# Allegro board hfplink_v1.brd
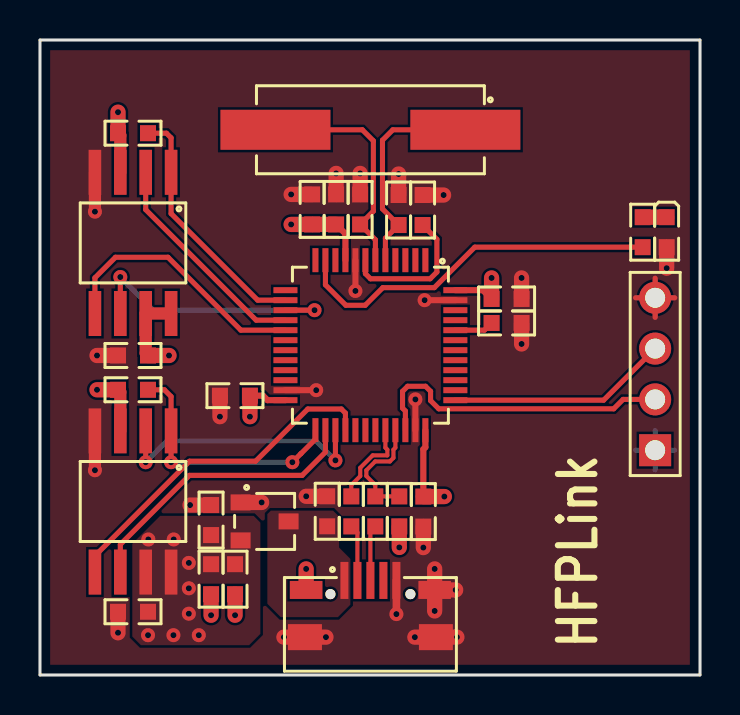
[diagram p0: board, top side]
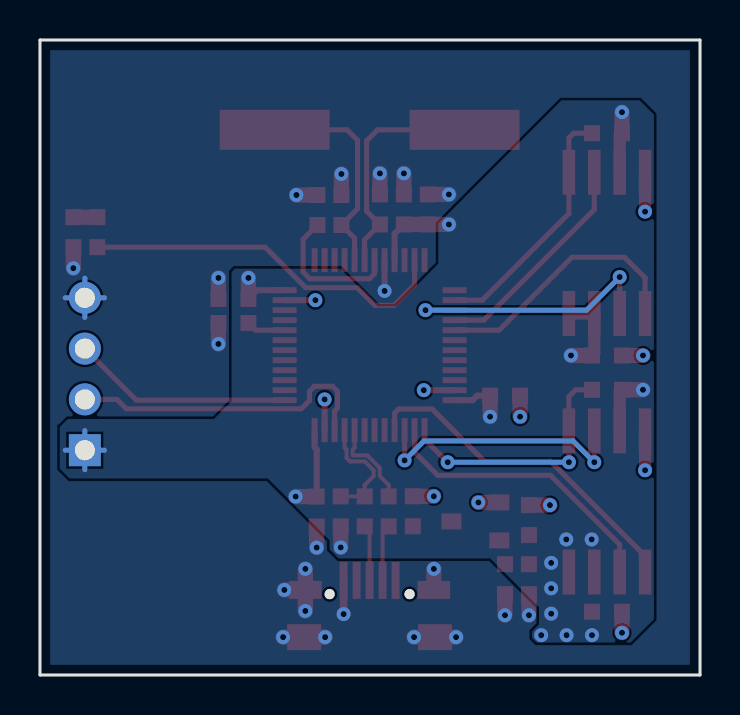
[diagram p1: board, bottom side, seen from below]

Outline 33.02 x 31.75 mm; copper layers: TOP, BOTTOM. Coordinates in mm from the lower left corner of the outline.
Outline path: 0,31.75 0,0 33.02,0 33.02,31.75 0,31.75

## Design rules (mm)
net group USB_DPB: nets D+ D-
net group USB_DPF: nets N01748 N01752

## Placement (name value [footprint] x y rotation side)
C1  100nF  [C0603]  23.34 18.8 180 top
C2  100nF  [C0603]  19.18 8.17 90 top
C3  18pF  [C0603]  17.94 23.25 270 top
C4  18pF  [C0603]  16.01 23.28 270 top
C5  100nF  [C0603]  19.14 23.25 270 top
C6  10uF  [C0603]  14.37 8.19 90 top
C7  10uF  [C0603]  8.56 7.75 90 top
C8  10uF  [C0603]  8.56 4.79 270 top
C9  100nF  [C0603]  9.76 4.79 270 top
C10  4.7uF  [C0603]  14.82 23.28 270 top
C11  100nF  [C0603]  13.62 23.28 90 top
C12  100nF  [C0603]  9.75 13.97 0 top
C13  100nF  [C0603]  4.65 15.98 180 top
C14  100nF  [C0603]  4.65 3.16 180 top
J1  USB_MICRO  [USB-MICRO-5-SM]  16.53 3.07 0 top
J2  HEADER-4X1  [HDR4X1-2R54-TM-VM]  30.78 11.24 90 top
LED1  GREEN  [LED0603]  31.35 22.14 270 top
R1  20R  [R0603]  15.58 8.18 90 top
R2  10K  [R0603]  23.34 17.6 180 top
R3  20R  [R0603]  16.78 8.18 90 top
R4  1.5K  [R0603]  17.98 8.18 270 top
R5  2K  [R0603]  30.15 22.14 270 top
R6  10K  [R0603]  4.65 27.09 0 top
R7  10K  [R0603]  4.65 14.26 0 top
U1  STM32F103C8T6  [LQFP-48-1R20X0R30]  16.53 16.49 180 top
U2  XC6206P332MR  [SOT-23-3-1R00X0R80]  11.24 7.68 0 top
U3  W25Q128JVSIQ  [SOIC-8-2R25X0R63]  4.65 21.6 180 top
U4  W25Q128JVSIQ  [SOIC-8-2R25X0R63]  4.65 8.68 180 top
X1  8MHz  [HC-49S]  16.53 27.26 180 top

## Library data of the parts
C1-C14 = CAPACITOR-NON-POL
J1 = USB_MICRO
J2 = HEADER-4X1
LED1 = LED
R1-R7 = RESISTOR
U1 = STM32F103C8T6
U2 = XC6206P332MR
U3 U4 = W25Q128JVSIQ
X1 = XTAL-CRY-2

## Footprints (pads in the part's own frame, mm; a bottom-side part is the same pattern mirrored in y, then rotated)
C0603
  rect 0.8x0.8 smd: 1(-0.75,0) 2(0.75,0)
HC-49S
  rect 5.5x2 smd: 1(-4.75,0) 2(4.75,0)
HDR4X1-2R54-TM-VM
  rect 1.6x1.6 hole 1: 1(0,0)
  round 1.6 hole 1: 2(2.54,0) 3(5.08,0) 4(7.62,0)
LED0603
  rect 0.8x0.8 smd: 1(-0.75,0) 2(0.75,0)
LQFP-48-1R20X0R30
  rect 0.3x1.2 smd: 1(-2.75,-4.25) 2(-2.25,-4.25) 3(-1.75,-4.25) 4(-1.25,-4.25) 5(-0.75,-4.25) 6(-0.25,-4.25) 7(0.25,-4.25) 8(0.75,-4.25) 9(1.25,-4.25) 10(1.75,-4.25) 11(2.25,-4.25) 12(2.75,-4.25) 25(2.75,4.25) 26(2.25,4.25) 27(1.75,4.25) 28(1.25,4.25) 29(0.75,4.25) 30(0.25,4.25) 31(-0.25,4.25) 32(-0.75,4.25) 33(-1.25,4.25) 34(-1.75,4.25) 35(-2.25,4.25) 36(-2.75,4.25)
  rect 1.2x0.3 smd: 13(4.25,-2.75) 14(4.25,-2.25) 15(4.25,-1.75) 16(4.25,-1.25) 17(4.25,-0.75) 18(4.25,-0.25) 19(4.25,0.25) 20(4.25,0.75) 21(4.25,1.25) 22(4.25,1.75) 23(4.25,2.25) 24(4.25,2.75) 37(-4.25,2.75) 38(-4.25,2.25) 39(-4.25,1.75) 40(-4.25,1.25) 41(-4.25,0.75) 42(-4.25,0.25) 43(-4.25,-0.25) 44(-4.25,-0.75) 45(-4.25,-1.25) 46(-4.25,-1.75) 47(-4.25,-2.25) 48(-4.25,-2.75)
R0603
  rect 0.8x0.8 smd: 1(-0.75,0) 2(0.75,0)
SOIC-8-2R25X0R63
  rect 0.63x2.25 smd: 1(-1.905,-3.53) 2(-0.635,-3.53) 3(0.635,-3.53) 4(1.905,-3.53) 5(1.905,3.53) 6(0.635,3.53) 7(-0.635,3.53) 8(-1.905,3.53)
SOT-23-3-1R00X0R80
  rect 1x0.8 smd: 1(-1.2,0.95) 2(-1.2,-0.95) 3(1.2,0)
USB-MICRO-5-SM
  rect 0.4x1.85 smd: 1(-1.3,1.655) 2(-0.65,1.655) 3(0,1.655) 4(0.65,1.655) 5(1.3,1.655)
  rect 1.63x0.9 smd: 6(-3.215,1.18) 7(3.215,1.18)
  rect 1.7x1.3 smd: 8(-3.275,-1.18) 9(3.275,-1.18)
  round 0.51 hole 0.5: 10(-2,0.97) 11(2,0.97)

## Nets
GND: C1.1 C2.1 C3.1 C4.1 C5.1 C6.2 C7.2 C8.2 C9.2 C10.1 C11.2 C12.1 C13.2 C14.2 J1.5(GND) J1.6(LP1) J1.7(LP2) J1.8(LP3) J1.9(LP4) J2.4 LED1.2 R2.1 U1.8(VSSA) U1.23(VSS_1) U1.35(VSS_2) U1.47(VSS_3) U2.1(VSS) U3.4(GND) U4.4(GND)
VCC_3V3: C1.2 C2.2 C7.1 C8.1 C9.1 C10.2 C11.1 C12.2 C13.1 C14.1 J2.1 R4.2 R6.1 R7.1 U1.9(VDDA) U1.24(VDD_1) U1.36(VDD_2) U1.48(VDD_3) U2.2(VOUT) U3.3(W\P\) U3.7(H\O\L\D\) U3.8(VCC) U4.3(W\P\) U4.7(H\O\L\D\) U4.8(VCC)
VCC_5V: C6.1 J1.1(VCC) U2.3(VIN)
D+: R3.2 R4.1 U1.33(PA12)
D-: R1.2 U1.32(PA11)
SPI1_CLK: U1.15(PA5) U3.6(CLK)
SPI1_CS: R6.2 U1.14(PA4) U3.1(C\S\)
SPI1_MISO: U1.16(PA6) U3.2(DO)
SPI1_MOSI: U1.17(PA7) U3.5(DI)
SPI2_CLK: U1.26(PB13) U4.6(CLK)
SPI2_CS: R7.2 U1.25(PB12) U4.1(C\S\)
SPI2_MISO: U1.27(PB14) U4.2(DO)
SPI2_MOSI: U1.28(PB15) U4.5(DI)
SWCLK: J2.3 U1.37(PA14)
SWDIO: J2.2 U1.34(PA13)
N01748: J1.2(D-) R1.1
N01752: J1.3(D+) R3.1
N02190: C3.2 U1.5(PD0-OSC_IN) X1.1(OUT1)
N02267: C4.2 U1.6(PD1-OSC_OUT) X1.2(OUT2)
N03348: C5.2 U1.7(NRST)
N04630: R5.2 U1.11(PA1)
N04691: LED1.1 R5.1
N08223: R2.2 U1.44(BOOT0)

Pads without a net: J1 4 10 11; U1 1 2 3 4 10 12 13 18 19 20 21 22 29 30 31 38 39 40 41 42 43 45 46

## Via types
v1: diameter 0.7, hole 0.305, TOP to BOTTOM, 54 vias

## Routing (per net, layer and track width the routed paths; a pad name or vN(x,y) marks a point on that pad's centre or on a via; arc(x,y) is an arc through that point)
GND: length 45.9
  TOP w0.254: 30.78,17.88 J2.4 ; J2.4 31.75,18.86 ; J2.4 29.8,18.86 ; J2.4 30.78,19.84
  TOP w0.305: U1.47 v1(19.24,18.74) ; U1.23 v1(13.82,14.24) ; U1.35 v1(18.78,13.78) ; U1.8 v1(15.78,19.2)
  TOP w0.381: J1.5 v1(17.83,3.05)
  TOP w0.61: U3.4 v1(2.75,23.17) ; U4.4 v1(2.75,10.24)
  TOP w0.762: C13.2 v1(2.85,15.98) ; C4.1 v1(16.01,25.08) ; C10.1 v1(14.82,25.08) ; C3.1 v1(17.94,25.05) ; v1(12.2,1.89) J1.8 v1(14.31,1.89) ; v1(18.75,1.89) J1.9 v1(20.86,1.89) ; C12.1 v1(9,12.92) ; C1.1 v1(24.09,19.85) ; J1.7 v1(20.8,4.25) ; J1.7 v1(19.75,5.3) ; J1.7 v1(19.75,3.2) ; C7.2 v1(7.51,8.5) ; LED1.2 v1(31.35,20.34) ; C8.2 v1(8.56,2.99) ; C2.1 v1(19.18,6.37) ; R2.1 v1(24.09,16.55) ; C5.1 v1(20.19,24) ; C9.2 v1(9.76,2.99) ; J1.6 v1(13.32,5.3) ; C11.2 v1(12.56,24.03) ; U2.1 v1(11.09,8.63) ; C6.2 v1(13.32,8.94) ; C14.2 v1(3.9,2.11)
  BOTTOM w0.254: J2.4 30.78,19.84 ; J2.4 31.75,18.86 ; J2.4 29.8,18.86 ; J2.4 30.78,17.88
VCC_3V3: length 30.2
  TOP w0.305: U1.24 11.38,13.74 11.16,13.97 C12.2 ; C2.2 19.18,11.28 19.28,11.39 U1.36 ; C1.2 22.15,19.24 U1.48 ; C10.2 15.28,22.06 U1.9
  TOP w0.61: U3.3 4.02,26.98 R6.1 ; U3.8 U3.7 5.29,16.09 C13.1 ; R7.1 4.02,14.15 U4.3
  TOP w0.762: R6.1 v1(3.9,28.14) ; C10.2 C11.1 v1(12.56,22.53) ; C2.2 v1(20.23,8.92) ; C1.2 v1(22.59,19.85) ; R7.1 v1(2.85,14.26) ; R4.2 v1(17.98,6.38) ; C12.2 v1(10.5,12.92) ; C13.1 v1(6.46,15.98)
  BOTTOM w0.254: 30.78,10.26 J2.1 ; J2.1 29.8,11.24 ; J2.1 30.78,12.22 ; J2.1 31.75,11.24
  vias: v1(5.42,6.78) v1(5.41,1.99) v1(6.69,6.78) v1(6.68,1.99) v1(7.45,5.61) v1(7.45,4.34) v1(7.45,3.07) v1(7.95,1.99)
D+: length 5.7
  TOP w0.203: R4.1 R3.2 16.78,9.5 16.33,9.95 16.33,10.23 16.77,10.68 17.5,10.68 17.68,10.86 17.68,11.27 17.78,11.37 U1.33
D-: length 4.5
  TOP w0.203: R1.2 15.58,9.5 16.02,9.95 16.02,10.36 16.64,10.98 17.38,10.98 17.38,11.27 17.28,11.37 U1.32
SPI1_CLK: length 13.7
  TOP w0.254: U1.15 v1(13.74,18.24) ; U3.6 v1(4.02,19.9)
  BOTTOM w0.254: v1(4.02,19.9) 5.68,18.24 v1(13.74,18.24)
SPI1_CS: length 12.6
  TOP w0.254: U1.14 10.89,18.74 6.56,23.07 U3.1 6.56,26.86 6.33,27.09 R6.2
SPI1_MISO: length 11.1
  TOP w0.254: U1.16 10.82,17.74 5.29,23.27 U3.2
SPI1_MOSI: length 13.3
  TOP w0.254: U1.17 10.05,17.24 6.4,20.89 3.78,20.89 2.75,19.86 U3.5
SPI2_CLK: length 14.7
  TOP w0.254: U1.26 14.28,11.14 13.12,9.98 7.48,9.98 4.02,6.53 U4.6
SPI2_CS: length 12.7
  TOP w0.254: v1(12.63,10.64) 13.05,11.07 13.06,11.07 13.78,11.79 U1.25 ; R7.2 6.22,14.26 6.56,13.92 U4.1 v1(6.56,10.64)
  BOTTOM w0.254: v1(6.56,10.64) v1(12.63,10.64)
SPI2_MISO: length 13.4
  TOP w0.254: U4.2 v1(5.29,10.64) ; U1.27 v1(14.78,10.73)
  BOTTOM w0.254: v1(5.29,10.64) 6.35,11.7 13.81,11.7 v1(14.78,10.73)
SPI2_MOSI: length 17.3
  TOP w0.254: U1.28 15.28,13.1 15.08,13.3 13.4,13.3 10.79,10.69 7.48,10.69 2.75,5.96 U4.5
SWCLK: length 11.1
  TOP w0.254: U1.37 28.2,13.74 J2.3
SWDIO: length 15.7
  TOP w0.254: U1.34 18.28,13.2 18.14,13.34 18.14,14.18 18.39,14.44 19.29,14.44 19.54,14.18 19.54,13.72 19.95,13.31 28.7,13.31 29.17,13.78 J2.2
N01748: length 2.8
  TOP w0.203: R1.1 15.88,7.13 J1.2
N01752: length 2.8
  TOP w0.203: R3.1 16.53,7.19 J1.3
N02190: length 11
  TOP w0.254: U1.5 17.28,21.84 C3.2 17.13,23.31 17.13,26.74 17.65,27.26 X1.1
N02267: length 11.7
  TOP w0.254: U1.6 16.78,21.76 C4.2 16.68,23.19 16.68,26.71 16.13,27.26 X1.2
N03348: length 7.1
  TOP w0.254: C5.2 19.86,21.78 19.86,20.15 19.52,19.81 16.53,19.81 16.28,20.07 U1.7
N04630: length 18.7
  TOP w0.254: R5.2 21.75,21.39 19.73,19.37 17.15,19.37 16.27,18.49 15.3,18.49 14.28,19.51 U1.11
N04691: length 1.2
  TOP w0.762: LED1.1 R5.1
N08223: length 2
  TOP w0.254: R2.2 22.23,17.24 U1.44

## Copper pours and planes (outline as drawn; the poured copper is in the pictures)
GND on TOP: 0.51,0.51 0.51,31.24 32.51,31.24 32.51,0.51 ; 3 cut-outs
GND on BOTTOM: 0.51,0.51 0.51,31.24 32.51,31.24 32.51,0.51
VCC_3V3 on TOP: 6.01,7.96 10.69,7.96 11.03,7.62 11.03,2.05 10.46,1.49 5.05,1.49 4.62,1.92 4.62,6.56
VCC_3V3 on BOTTOM: 8.41,2.18 8.06,2.53 8.06,3.39 10.49,5.83 18.08,5.83 18.53,6.28 18.53,6.74 21.62,9.83 31.54,9.83 32.03,10.32 32.03,12.4 32.03,12.4 31.63,12.8 24.32,12.8 23.44,13.68 23.44,15.61 23.44,20.16 23.28,20.32 18,20.32 16.11,18.43 15.22,18.43 13.91,19.74 13.91,19.74 13.09,20.57 13.09,22.57 11.53,24.14 6.93,28.73 3.02,28.73 2.31,28.02 2.31,2.79 3.47,1.62 8.18,1.62 8.41,1.85
VCC_5V on TOP: 11.55,8.22 14.66,8.22 14.96,7.92 14.96,6.37 15.53,5.8 15.53,3.52 14.91,2.89 12.04,2.89 11.37,3.56 11.37,8.05

## Text on the board
Ref Des/Silkscreen Top: HFPLink
NCLEGEND-1-2: FIGURE | SIZE | 12.0 | 19.69 | 39.37 | DRILL CHART: TOP to BOTTOM | ALL UNITS ARE IN MILS | PLATED | QTY | 54 | 2 | 4
